# Altium PCB PCB Accel LEDs - Eddie.PcbDoc
Units mm, origin at the board's own origin, x right, y up, seen from the top; angles counter-clockwise.
Board outline 58 x 94 mm, 2 copper layers (L1, L2), stack 1.871 mm thick; 61 components, 53 nets, 212 pads, 57 vias.
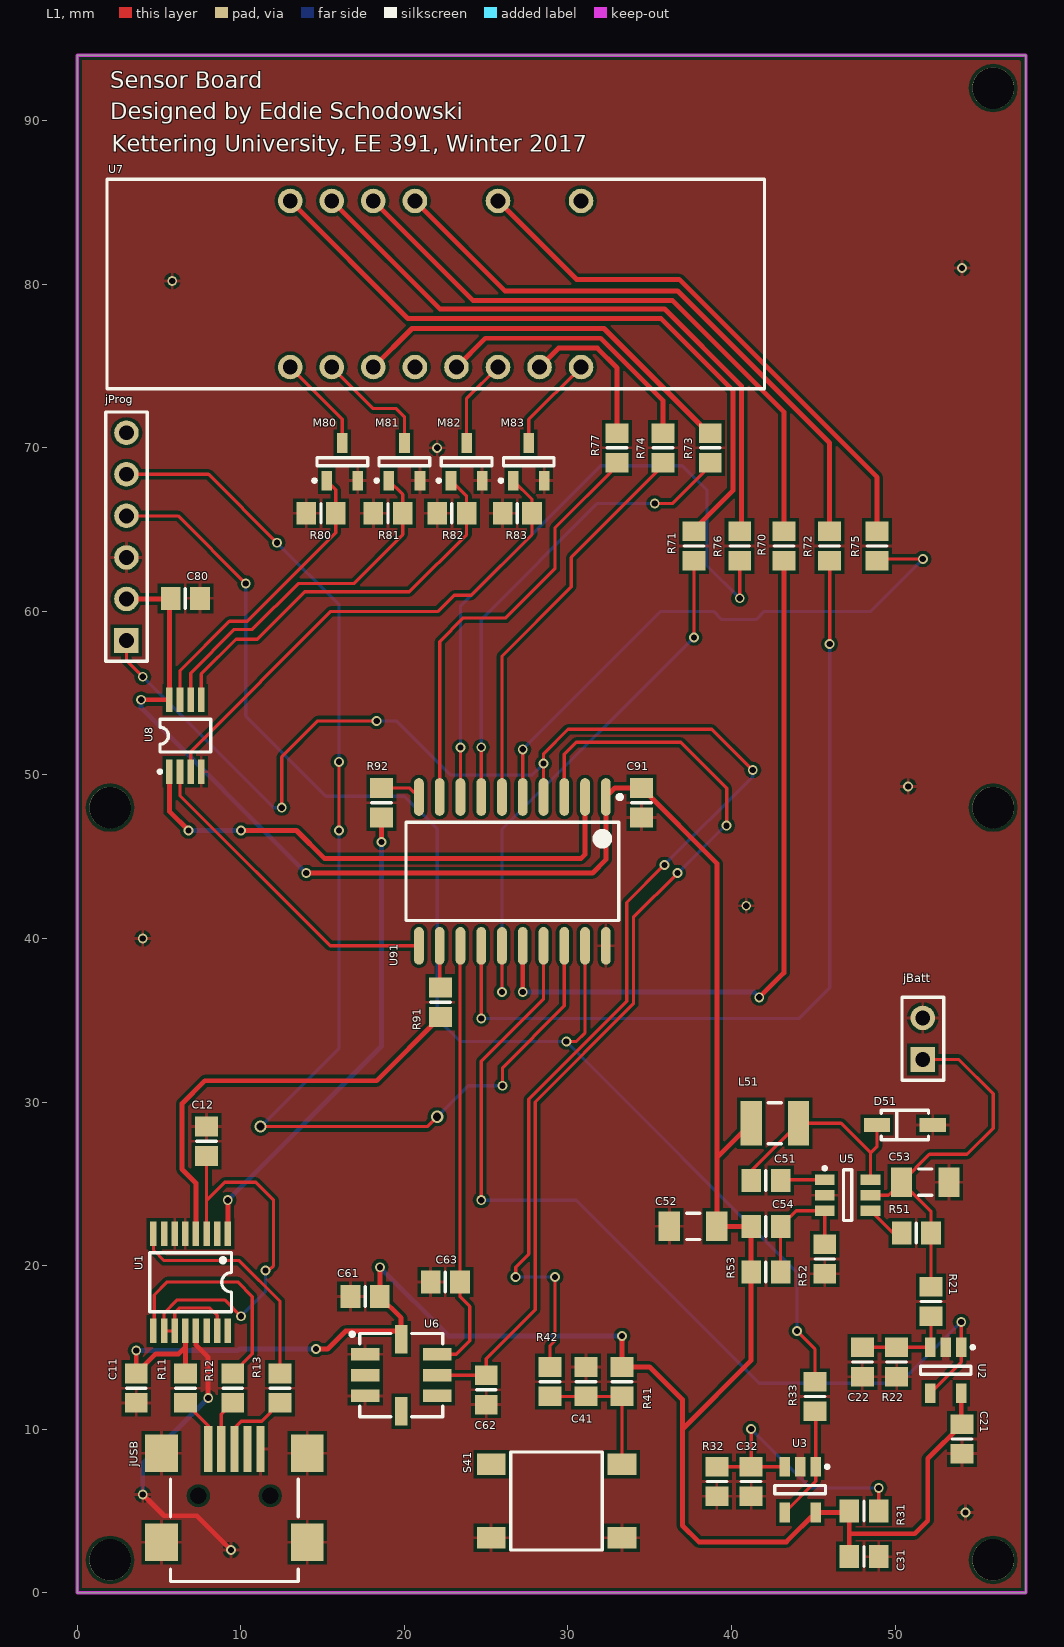
[diagram p0: L1 view]
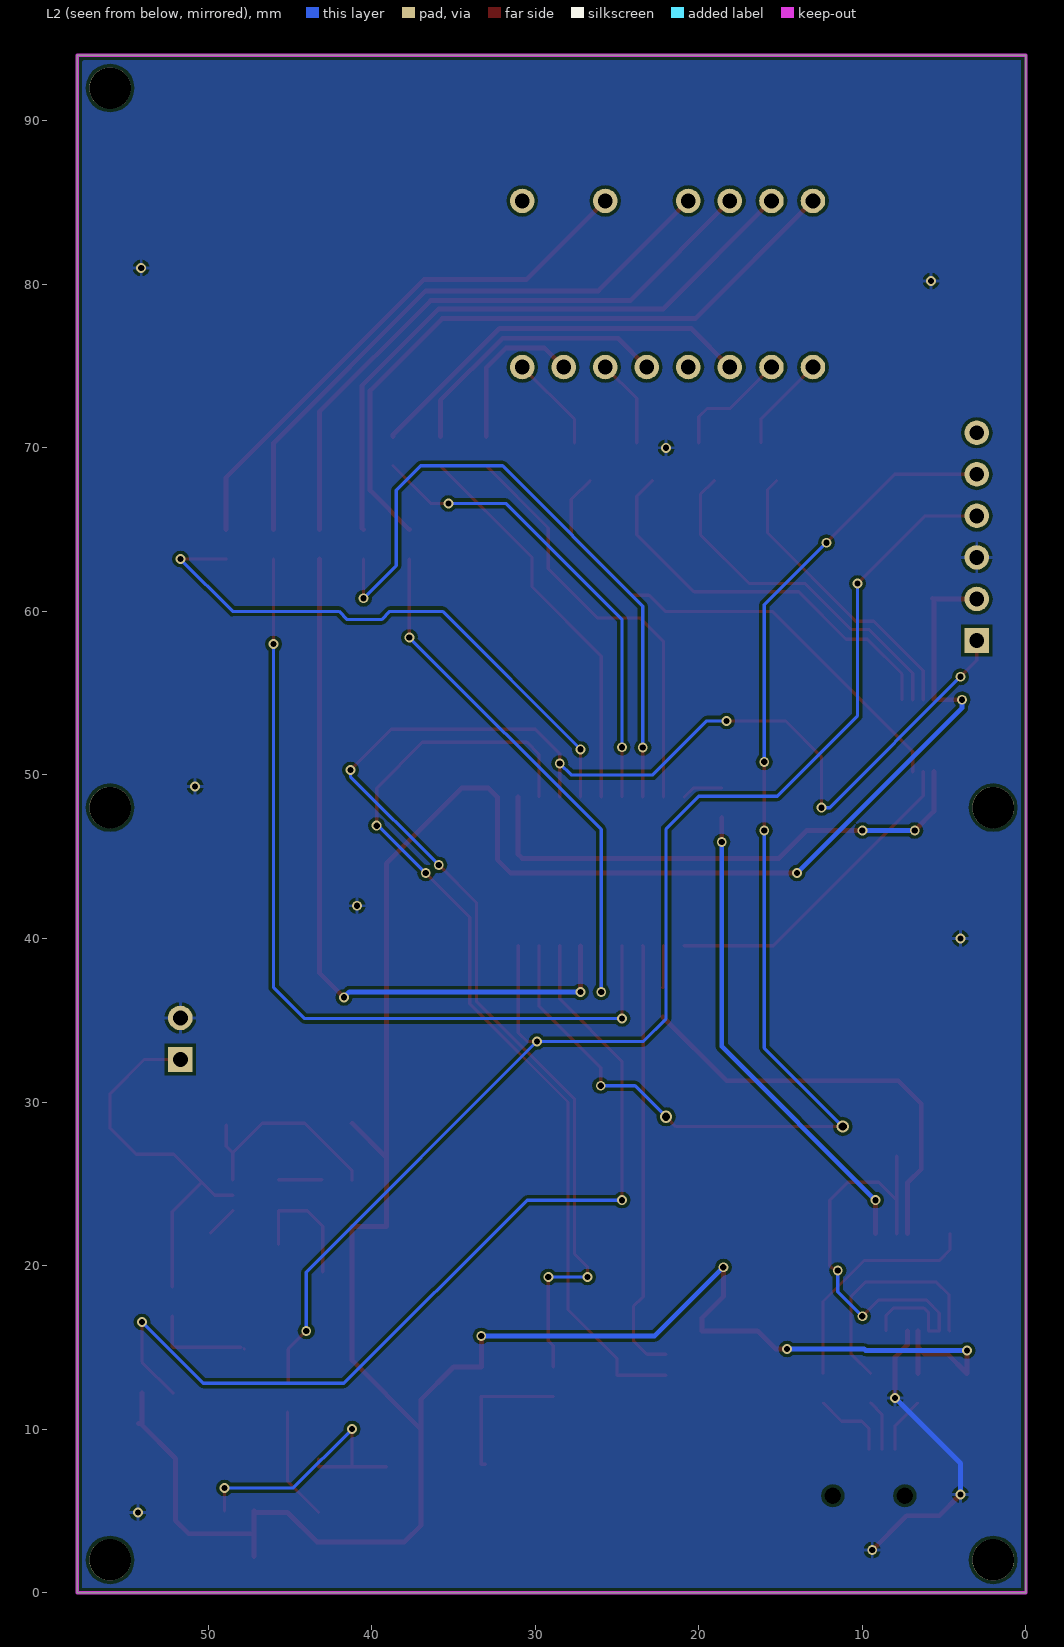
[diagram p1: L2 view, seen from below]

## Layer stack, top to bottom
L1: signal copper 0.0356
Dielectric: core 1.8, FR-4, Dk 4.8
L2: signal copper 0.0356

## Board outline
0,0 58,0 58,94 0,94

## Design rules (kind name [scope] priority, off if disabled: settings)
Clearance [All] p1: gap=0.2
ComponentClearance [All] p1: gap=0.2 collisioncheckmode=3 verticalgap=0.2 showdistances=FALSE
HoleSize [All] p1: absolutevalues=TRUE maxlimit=3.26 minlimit=0.2 maxpercent=80.000 minpercent=20.000
HoleToHoleClearance [All] p1: gap=0.2 allowstackedmicrovias=TRUE
MinimumSolderMaskSliver [All] p1: minsoldermaskwidth=0.01
PolygonConnect "GND Connect" [InComponent('JBAT','SPKR','U2','U3')] p1: connectstyle=Relief reliefconductorwidth=0.5 reliefentries=4 polygonreliefangle="90 Angle"
PolygonConnect "Poly Connect" [All] p2: connectstyle=Relief reliefconductorwidth=0.2 reliefentries=4 polygonreliefangle="90 Angle"
RoutingVias [All] p1: holewidth=0.5 width=1 viastyle="Through Hole" minholewidth=0.381 minwidth=0.6 maxholewidth=1 maxwidth=2
SilkToSilkClearance [All] p1: silktosilkclearance=0.1
SilkscreenOverComponentPads [All] p1: minsilkscreentomaskgap=0.1
SolderMaskExpansion [All] p1: expansion=0.102
Width "Default Width" [All] p1: maxlimit=1.5 minlimit=0.178 preferedwidth=0.2
22 further rules are at their usual default settings.

## Components (designator, comment, footprint, x,y, rotation, side; value= is the part's Value field where it differs from the comment)
C11 "C0805C104K5VACTU" CAPC2012N 3.6,12.5 r270 top
C12 "C0805C104K5VACTU" CAPC2012N 7.9,27.6 r90 top
C21 "C0805C104K5VACTU" CAPC2012N 54.1,9.4 r90 top
C22 "C0805C104K5VACTU" CAPC2012N 48,14.1 r90 top
C31 "C0805C104K5VACTU" CAPC2012N 48.1,2.2 r0 top
C32 "C0805C104K5VACTU" CAPC2012N 41.2,6.8 r270 top
C41 "C0805C102K5RACTU" CAPC2012N 31.1,12.9 r270 top
C51 "C0805C104K5VACTU" CAPC2012N 42.1,25.2 r0 top
C52 "C3216X5R1H106M" CAPC3216N 37.65,22.4 r180 top
C53 "C3216X5R1H106M" CAPC3216N 51.85,25.1 r0 top
C54 "C0805C102K5RACTU" CAPC2012N 42.1,22.4 r0 top
C61 "C0805C104K5VACTU" CAPC2012N 17.6,18.1 r0 top
C62 "C0805C102K5RACTU" CAPC2012N 25,12.4 r90 top
C63 "C0805C102K5RACTU" CAPC2012N 22.5,19 r0 top
C80 "C0805C104K5VACTU" CAPC2012N 6.6,60.8 r0 top
C91 "C0805C104K5VACTU" CAPC2012N 34.5,48.3 r90 top
D51 "MBRX160-TP" SOD123 50.6,28.6 r0 top
jBatt "Header 2" HDR1X2 51.7,32.6 r90 top
jProg "68000-406HLF" HDR1X6 3,64.57 r90 top
jUSB "MUSB-B5-S-RA-TSMT" MUSB-B5-S-RA-TSMT 9.6,5.9 r90 top
L51 "BRL3225T100K" INDC3225N 42.65,28.7 r180 top
M80 "BSS123" SOT23-3N 16.2,69.15 r90 top
M81 "BSS123" SOT23-3N 20,69.15 r90 top
M82 "BSS123" SOT23-3N 23.8,69.15 r90 top
M83 "BSS123" SOT23-3N 27.6,69.15 r90 top
R11 "ERJ-6GEY0R00V" RESC2012N 6.6,12.5 r270 top
R12 "ERJ-6ENF27R0V" RESC2012N 9.5,12.5 r270 top
R13 "ERJ-6ENF27R0V" RESC2012N 12.4,12.5 r270 top
R21 "ERJ-6ENF1002V" RESC2012N 52.2,17.8 r270 top
R22 "ERJ-6ENF1002V" RESC2012N 50.1,14.1 r270 top
R31 "ERJ-6ENF1002V" RESC2012N 48.1,5 r180 top
R32 "NTCS0805E3103FMT" RESC2012N 39.1,6.8 r90 top
R33 "ERJ-6ENF1002V" RESC2012N 45.1,12 r90 top
R41 "ERJ-6ENF1002V" RESC2012N 33.3,12.9 r270 top
R42 "ERJ-6ENF1000V" RESC2012N 28.9,12.9 r270 top
R51 "ERJ-6ENF1003V" RESC2012N 51.3,22 r180 top
R52 "ERJ-6ENF1002V" RESC2012N 45.7,20.4 r270 top
R53 "ERJ-6ENF5492V" RESC2012N 42.1,19.6 r180 top
R70 "ERJ-6ENF4700V" RESC2012N 43.2,64 r90 top
R71 "ERJ-6ENF4700V" RESC2012N 37.7,64 r90 top
R72 "ERJ-6ENF4700V" RESC2012N 46,64 r90 top
R73 "ERJ-6ENF4700V" RESC2012N 38.7,70 r90 top
R74 "ERJ-6ENF4700V" RESC2012N 35.8,70 r90 top
R75 "ERJ-6ENF4700V" RESC2012N 48.9,64 r90 top
R76 "ERJ-6ENF4700V" RESC2012N 40.5,64 r90 top
R77 "ERJ-6ENF4700V" RESC2012N 33,70 r90 top
R80 "ERJ-6ENF1002V" RESC2012N 14.9,66 r0 top
R81 "ERJ-6ENF1002V" RESC2012N 19,66 r0 top
R82 "ERJ-6ENF1002V" RESC2012N 22.9,66 r180 top
R83 "ERJ-6ENF1002V" RESC2012N 26.9,66 r180 top
R91 "ERJ-6ENF10R0V" RESC2012N 22.2,36.1 r270 top
R92 "ERJ-6ENF10R0V" RESC2012N 18.6,48.3 r270 top
S41 "PTS645SK50SMTR92" "PTS645 Series" 29.3,5.6 r0 top
U1 "FT230XS" TSSOP-16 6.925,18.975 r180 top
U2 "MCP6241T" SOT23-5N 53.1,13.6 r270 top
U3 "MCP6241T" SOT23-5N 44.2,6.3 r270 top
U5 "LMR16006Y" SOT23-6N 47.1,24.3 r0 top
U6 "ADXL203CE" LCC-8 19.8,13.3 r0 top
U7 "LTC-4727JR" "LTC Series" 21.91,80.02 r0 top
U8 "SN74LVC1G139" TSSOP-8 6.6,52.4 r0 top
U91 "PIC16F1829-I/SO" SOIC-20-300 26.6,44.1 r270 top

## Footprints (in the part's own frame and the unit in brackets; to place one, negate y for a bottom-side part, rotate by r counter-clockwise, add the part's x,y. Pads: shape width x height; smd on the part's side, far side on the other; paste and mask are expansions set on the pad)
CAPC2012N [mm] "Chip Capacitor, Body 2.0x1.3mm, IPC Medium Density"
  rect 1.2x1.4 smd: 1(-0.9,0) 2(0.9,0)
  silkscreen extent 0,-0.6 0,0.6, body extent -1.07,-0.7 1.07,0.7, height 0.7
CAPC3216N [mm] "Chip Capacitor, Body 3.2x1.6mm, IPC Medium Density"
  rect 1.3x1.8 smd: 1(-1.45,0) 2(1.45,0)
  silkscreen extent -0.4,-0.8 0.4,0.8, body extent -1.7,-0.9 1.7,0.9, height 1.35
HDR1X2 [mm] "Connector; Header; 2 Position"
  rect 1.5x1.5 hole 0.9: 1(0,0)
  round 1.5 hole 0.9: 2(2.54,0)
  silkscreen extent -1.27,-1.27 3.81,1.27
HDR1X6 [mm] "Connector; Header; 6 Position"
  rect 1.5x1.5 hole 0.9: 1(-6.35,0)
  round 1.5 hole 0.9: 2(-3.81,0) 3(-1.27,0) 4(1.27,0) 5(3.81,0) 6(6.35,0)
  silkscreen extent -7.62,-1.27 7.62,1.27, body extent -7.62,-1.27 7.62,1.27, height 8
INDC3225N [mm] "Chip Inductor, Body 3.2x2.5mm, IPC Medium Density"
  rect 1.3x2.7 smd: 1(-1.45,0) 2(1.45,0)
  silkscreen extent -0.4,-1.25 0.4,1.25, body extent -1.7,-1.35 1.7,1.35, height 1.5
LCC-8 [mm] "Terminal Ceramic Leadless Chip Carrier, 8-pin, 50mil pitch"
  rect 1.75x0.762 smd: 1(-2.205,1.27) 2(-2.205,0) 3(-2.205,-1.27) 5(2.205,-1.27) 6(2.205,0) 7(2.205,1.27)
  rect 0.762x1.75 smd: 4(0,-2.205) 8(0,2.205)
  silkscreen extent -3.1,-2.54 2.54,2.6, body extent -2.54,-2.54 2.54,2.54, height 1.98
"LTC Series" [mm] "Through hole LED array, 12.8 x 40.2 x 7.0mm (LxWxH), 2.54mm pitch"
  round 1.5 hole 0.9: 1(-8.89,-5.08) 2(-6.35,-5.08) 3(-3.81,-5.08) 4(-1.27,-5.08) 5(1.27,-5.08) 6(3.81,-5.08) 7(6.35,-5.08) 8(8.89,-5.08) 9(8.89,5.08) 11(3.81,5.08) 13(-1.27,5.08) 14(-3.81,5.08) 15(-6.35,5.08) 16(-8.89,5.08)
  silkscreen extent -20.1,-6.4 20.1,6.4, body extent -20.09,-6.4 20.09,6.4, height 7
MUSB-B5-S-RA-TSMT [mm] "SM Mini-USB Type-A Connector"
  rect 2.3x2 smd: 0(-2.825,4.45) 0(-2.825,-4.45) 0(2.625,4.45) 0(2.625,-4.45)
  rect 2.8x0.5 smd: 1(2.875,1.6) 2(2.875,0.8) 3(2.875,0) 4(2.875,-0.8) 5(2.875,-1.6)
  round 0 hole 1 unplated: ""(0.025,2.2) ""(0.025,-2.2)
  silkscreen extent -5.22,-3.9 1.03,3.9, body extent -5.8,-4.95 3.7,4.95, height 4.03
"PTS645 Series" [mm] "SMT Tactile Switch, 6x6mm body, 4.5mm pitch, 9mm length"
  rect 1.75x1.3 smd: 1(-4,2.25) 2(4,2.25) 3(-4,-2.25) 4(4,-2.25)
  silkscreen extent -2.8,-3 2.8,3, body extent -4.5,-3 4.5,3, height 4.3
RESC2012N [mm] "Chip Resistor, Body 2.0x1.2mm, IPC Medium Density"
  rect 1.2x1.4 smd: 1(-0.9,0) 2(0.9,0)
  silkscreen extent 0,-0.6 0,0.6, body extent -1.07,-0.7 1.07,0.7, height 0.7
SOD123 [mm] "SOD-123; 2 Leads; Body 2.7 x 1.6 mm, (LxW)"
  rect 1.6x0.85 smd: 1(1.7,0) 2(-1.7,0)
  silkscreen extent -1.45,-0.9 1.45,0.9, body extent -1.95,-0.9 1.95,0.9, height 1.18
SOIC-20-300 [mm] "20-Pin Plastic Wide Body Small Outline Integrated Circuit 1.27 mm Pitch, IPC Medium Density"
  oval 2.3x0.6 smd: 1(-4.55,5.715) 2(-4.55,4.445) 3(-4.55,3.175) 4(-4.55,1.905) 5(-4.55,0.635) 6(-4.55,-0.635) 7(-4.55,-1.905) 8(-4.55,-3.175) 9(-4.55,-4.445) 10(-4.55,-5.715) 11(4.55,-5.715) 12(4.55,-4.445) 13(4.55,-3.175) 14(4.55,-1.905) 15(4.55,-0.635) 16(4.55,0.635) 17(4.55,1.905) 18(4.55,3.175) 19(4.55,4.445) 20(4.55,5.715)
  silkscreen extent -4.67,-6.5 3,6.69, body extent -3.75,-6.4 3.75,6.4, height 2.65
SOT23-3N [mm] "SOT23, 3-Leads, Body 2.9x1.3mm, Pitch 0.95mm, Lead Span 2.8mm, IPC Medium Density"
  rect 1.2x0.65 smd: 1(-1.15,0.95) 2(-1.15,-0.95) 3(1.15,0)
  silkscreen extent -1.25,-1.55 0.25,1.8, body extent -1.25,-1.5 1.25,1.5, height 1
SOT23-5N [mm] "SOT23, 5-Leads, Body 2.9x1.6mm, Pitch 0.95mm, Lead Span 2.8mm, IPC Medium Density"
  rect 1.2x0.65 smd: 1(-1.4,0.95) 2(-1.4,0) 3(-1.4,-0.95) 4(1.4,-0.95) 5(1.4,0.95)
  silkscreen extent -1.5,-1.55 0.25,1.75, body extent -1.5,-1.5 1.5,1.5, height 1.45
SOT23-6N [mm] "SOT23, 6-Leads, Body 2.9x1.6mm, Pitch 0.95mm, Lead Span 2.8mm, IPC Medium Density"
  rect 1.2x0.65 smd: 1(-1.4,0.95) 2(-1.4,0) 3(-1.4,-0.95) 4(1.4,-0.95) 5(1.4,0) 6(1.4,0.95)
  silkscreen extent -1.5,-1.55 0.25,1.75, body extent -1.5,-1.5 1.5,1.5, height 1.45
TSSOP-8 [mm] "Shrink Small Outline; 8 Leads; Body Width 3.0 mm; Pitch 0.65 mm"
  rect 0.4x1.5 smd: 1(-0.975,-2.2) 2(-0.325,-2.2) 3(0.325,-2.2) 4(0.975,-2.2) 5(0.975,2.2) 6(0.325,2.2) 7(-0.325,2.2) 8(-0.975,2.2)
  silkscreen extent -1.65,-2.3 1.55,1, body extent -1.55,-2.5 1.55,2.5, height 1.09
TSSOP-16 [mm] "SSOP, Plastic; 16 Leads; Body Width 4.4 mm; Pitch 0.65 mm"
  rect 0.4x1.5 smd: 1(-2.275,-2.975) 2(-1.625,-2.975) 3(-0.975,-2.975) 4(-0.325,-2.975) 5(0.325,-2.975) 6(0.975,-2.975) 7(1.625,-2.975) 8(2.275,-2.975) 9(2.275,2.975) 10(1.625,2.975) 11(0.975,2.975) 12(0.325,2.975) 13(-0.325,2.975) 14(-0.975,2.975) 15(-1.625,2.975) 16(-2.275,2.975)
  silkscreen extent -2.5,-1.8 2.5,1.8, body extent -2.5,-3.2 2.5,3.2, height 1.1

## Part data
C11 C12 C21 C22 C31 C32 C41 C51 C52 C53 C54 C61 C62 C63 C80 C91: library part Cap, "Capacitor"
D51: library part "D Schottky", "Schottky Diode"
jBatt: "Header, 2-Pin"
jProg: library part "Header 6", "Header, 6-Pin"
jUSB: library part "USB Mini-B Conn", "Mini-USB Type-B Connector, Surface Mount"
L51: library part BLM21P221SN, "Ferrite Bead Inductor"
M80 M81 M82 M83: "Low-Power N-Channel MOSFET, 100V 170mA"
R11 R12 R13 R21 R22 R31 R33 R41 R42 R51 R52 R53 R70 R71 R72 R73 R74 R75 R76 R77 R80 R81 R82 R83 R91 R92: library part Res1, "Resistor"
R32: "NTC Thermistor Resistor, 10kOhm"
S41: "Tactile Switch, SPST-NO, Top-Actuated"
U1: "USB to Basic UART Converter"
U2: "Low-Power Operational Amplifier"
U3: library part MCP6241, "Low-Power Operational Amplifier"
U5: library part LMR16006X, "Step-down 2.1MHz Switching Regulator"
U6: "Dual-Axis SMT Accelerometer"
U7: "LED 7-Segment Display, 4-Digit, Common-Cathode"
U8: "Decoder / Demultiplexer, 2-to-4 Line"
U91: "8-Bit FLASH Microcontroller, 20-Pin SOIC"

## Free pads (board coordinates)
  round 2.54 hole 2.54 unplated: ""(2,2) ""(2,48) ""(56,2) ""(56,48) ""(56,92)

## Via types
v1: diameter 0.6, hole 0.381, L1 to L2, tented both sides, 55 vias
v2: diameter 0.75, hole 0.5, L1 to L2, tented both sides, 2 vias

## Nets (pads, with @x,y where several pads share a name; then routed paths per layer and width w, separated by ;. In a path a pad name is that pad's centre, name@x,y a point inside that pad or via, vN(x,y) a via of type N, cw(c..) or ccw(c..) an arc to the next point about the centre after c; other vN are vias at no path point)
3V3USB: C12.1 U1.3 U1.10 U1.11 U1.15 | length 32
  L1 w0.2: C12.1 7.9,24 ; U1.15 8.55,16.95 8.1,17.4 6.225,17.4 5.95,17.125 U1.11 U1.10 5.3,17.1 6.1,17.9 9,17.9 v1(10,16.9) ; v1(11.5,19.7) 11.7,19.7 12,20 12,24 10.9,25.1 9,25.1 7.9,24 ; 7.9,24 U1.3 7.9,24
  L2 w0.2: v1(10,16.9) 11.5,18.4 v1(11.5,19.7)
5V: C11.1 C21.2 C31.1 C52.1 C54.1 C61.2 C80.1 C91.2 jProg.2 L51.2 R11.1 R31.2 R41.1 R53.2 U1.12 U2.5 U3.5 U6.8 U8.8 U91.1 | length 185.9
  L1 w0.3: jProg.2 C80.1@5.64,60.76 ; v1(3.6,14.8) C11.1 4.8,14.6 6.2,14.6 6.5,14.9 ; v1(3.9,54.6) U8.8 C80.1@5.625,60.725 ; C80.1@5.65,60.75 C80.1 ; R11.1 6.6,14.9 ; U1.12 6.6,15 ; v1(14,44) 31.5,44 32.315,44.815 U91.1 32.865,49.2 C91.2 39.1,44.6 39.1,26.6 ; v1(14.6,14.9) 15.3,14.9 16.4,16 19.8,16 19.8,16.8 C61.2 v1(18.5,19.9) ; v1(33.3,15.7) R41.1 35,13.8 37,11.8 37,10 ; L51.2 39.1,26.6 ; C31.1 47.2,3.6 ; U2.5 54.05,10.35 54.1,10.35 C21.2@54.25,10.35 ; C21.2 52,8.2 52,4.4 51.2,3.6 47.2,3.6 ; 6.5,14.9 6.6,14.9 ; 6.5,14.9 6.6,15 ; 6.6,14.9 6.6,15 ; 37,10 41.2,14.2 R53.2 C54.1 C52.1 39.1,26.6 ; 37,10 37,4.1 38,3.1 43.35,3.1 U3.5 47.1,4.9 R31.2 47.2,3.6
  L2 w0.3: v1(3.6,14.8) 9.8,14.8 9.9,14.9 v1(14.6,14.9) ; v1(3.9,54.6) 3.9,54.1 v1(14,44) ; v1(18.5,19.9) 22.7,15.7 v1(33.3,15.7)
A: U8.1 U91.2 | length 32.6
  L1 w0.3: U8.1 5.625,47.775 v1(6.8,46.6) ; v1(10,46.6) 13.4,46.6 15.1,44.9 30.8,44.9 31.045,45.145 U91.2
  L2 w0.3: v1(6.8,46.6) v1(10,46.6)
AN3: C62.2 U6.6 U91.3 | length 59.1
  L1 w0.2: U6.6 C62.2 25,14.3 28,17.3 28,30 34,36 34,41.3 v1(36.7,44) ; U91.3 29.775,51.275 30.5,52 36.9,52 39.7,49.2 v1(39.7,46.9)
  L2 w0.2: v1(36.7,44) 39.6,46.9 v1(39.7,46.9)
AN10: C63.2 U6.7 U91.13 | length 26.7
  L1 w0.2: U6.7 23.17,14.57 24,15.4 24,17.5 23.4,18.1 C63.2 23.4,39.525 U91.13
B: U8.2 U91.11 | length 19.9
  L1 w0.2: U8.2 6.275,48.725 15.45,39.55 U91.11
BST: C51.2 U5.1 | length 2.6
  L1 w0.2: C51.2@43.05,25.25 U5.1
D+: jUSB.3 R13.2 | length 4.7
  L1 w0.2: jUSB.3 9.6,10.049 10.026,10.475 11.275,10.475 R13.2
D-: jUSB.2 R12.2 | length 3.1
  L1 w0.2: jUSB.2 8.8,10.9 R12.2
EN: R51.2 U5.4 | length 1.9
  L1 w0.2: U5.4 R51.2@49.85,22
FB: C54.2 R52.1 R53.1 U5.3 | length 7.9
  L1 w0.2: R53.1 C54.2 43.95,23.35 U5.3 R52.1
GND: C11.2 C12.2 C21.1 C22.1 C31.2 C32.2 C41.1 C52.2 C53.2 C61.1 C62.1 C63.1 C80.2 C91.1 D51.1 jBatt.2 jProg.3 jUSB.0 jUSB.5 M80.2 M81.2 M82.2 M83.2 R22.2 R32.1 R52.2 R80.1 R81.1 R82.2 R83.2 S41.3 S41.4 U1.5 U1.6 U1.13 U2.2 U3.2 U5.2 U6.1 U6.3 U8.4 U91.20 | length 18.8
  L1 w0.3: v1(4,6) 5.3,4.7 7.3,4.7 v1(9.4,2.6) ; U1.13 7.25,15.15 8,14.4 v1(8,11.9)
  L2 w0.3: v1(4,6) 4,7.9 v1(8,11.9)
  other v1: 54.3,4.9 4,40 40.9,42 50.8,49.3 22,70 5.8,80.2 54.1,81
ICSPCLK: jProg.5 U91.18 | length 76.2
  L1 w0.2: jProg.5 8.02,68.38 v1(12.2,64.2) ; v2(11.2,28.5) 21.4,28.5 v2(22,29.1) ; v1(16,46.6) v1(16,50.8) ; v1(26,31) 26,32.1 29.775,35.875 U91.18
  L2 w0.2: v2(11.2,28.5) 16,33.3 v1(16,46.6) v1@16,46.566 ; v1(12.2,64.2) 16,60.4 v1(16,50.8) ; v2(22,29.1) 23.9,31 v1(26,31)
ICSPDAT: jProg.4 R33.2 U91.19 | length 85.5
  L1 w0.2: jProg.4 6.16,65.84 v1(10.3,61.7) ; v1(29.9,33.7) 30.5,33.7 31.045,34.245 U91.19 ; v1(44,16) 45.1,14.9 R33.2
  L2 w0.2: v1(10.3,61.7) 10.3,53.6 15.2,48.7 20,48.7 22,46.7 22,35.1 23.4,33.7 v1(29.9,33.7) 44,19.6 v1(44,16)
LED_A: R70.1 U91.16 | length 44.8
  L1 w0.3: v1(27.235,36.735) U91.16 ; v1(41.7,36.4) 43.2,37.9 R70.1 R70.1@43.2,63.2
  L2 w0.3: v1(27.235,36.735) 41.365,36.735 v1(41.7,36.4)
LED_B: R71.1 U91.15 | length 34.1
  L1 w0.2: v1(25.965,36.735) U91.15 ; v1(37.7,58.4) R71.1 R71.1@37.7,63.2
  L2 w0.2: v1(25.965,36.735) 25.965,46.665 v1(37.7,58.4)
LED_C: R72.1 U91.14 | length 52.7
  L1 w0.2: v1(24.695,35.105) U91.14 ; v1(46,58) R72.1 R72.1@46,63.2
  L2 w0.2: v1(24.695,35.105) 44.105,35.105 46,37 v1(46,58)
LED_D: R73.1 U91.7 | length 28.7
  L1 w0.2: U91.7 v1(24.695,51.695) ; v1(35.3,66.6) 36.4,66.6 R73.1@38.7,68.9
  L2 w0.2: v1(24.695,51.695) 24.695,59.495 31.8,66.6 v1(35.3,66.6)
LED_DP: R77.1 U91.9 | length 26.3
  L1 w0.2: U91.9 22.155,58.155 23.6,59.6 26.2,59.6 29.2,62.6 29.2,65.1 R77.1@33,68.9
LED_E: R74.1 U91.6 | length 24.3
  L1 w0.2: U91.6 25.965,57.265 30.2,61.5 30.2,63.3 R74.1@35.8,68.9
LED_F: R75.1 U91.5 | length 35.4
  L1 w0.2: U91.5 v1(27.235,51.565) ; R75.1@48.9,63.2 v1(51.7,63.2)
  L2 w0.2: v1(27.235,51.565) 35.67,60 38.9,60 39.4,59.5 41.5,59.5 42,60 48.5,60 v1(51.7,63.2)
LED_G: R76.1 U91.8 | length 40.8
  L1 w0.2: U91.8 v1(23.425,51.675) ; v1(40.5,60.8) R76.1 R76.1@40.5,63.2
  L2 w0.2: v1(23.425,51.675) 23.425,60.325 32,68.9 37,68.9 38.5,67.4 38.5,62.8 v1(40.5,60.8)
NetC41_2: C41.2 R41.2 R42.2 S41.2 | length 8.8
  L1 w0.2: R42.2 C41.2 R41.2 S41.2 S41.2@33.05,7.85
NetM80_3: M80.3 U7.1 | length 6
  L1 w0.2: U7.1 16.2,71.76 M80.3
NetM81_3: M81.3 U7.2 | length 7.5
  L1 w0.2: U7.2@15.56,74.74 U7.2 18.1,72.4 19.5,72.4 20,71.9 M81.3
NetM82_3: M82.3 U7.6 | length 5.4
  L1 w0.2: M82.3 23.8,73.02 U7.6
NetM83_3: M83.3 U7.8 | length 6
  L1 w0.2: M83.3 27.6,71.74 U7.8
NetR70_2: R70.2 U7.14 | length 37.6
  L1 w0.3: U7.14 24.2,79 36.4,79 43.2,72.2 R70.2@43.2,65
NetR71_2: R71.2 U7.16 | length 41.4
  L1 w0.3: U7.16 20.22,77.9 35.7,77.9 40.1,73.5 40.1,67.4 R71.2@37.7,65
NetR72_2: R72.2 U7.13 | length 36.8
  L1 w0.3: U7.13 26.14,79.6 36.7,79.6 46,70.3 R72.2@46,65
NetR73_2: R73.2 U7.3 | length 24.4
  L1 w0.3: U7.3 20.46,77.3 32.2,77.3 38.65,70.85 38.7,70.8 R73.2@38.7,70.7
NetR74_2: R74.2 U7.5 | length 17.1
  L1 w0.3: U7.5 24.94,76.7 32,76.7 35.8,72.9 R74.2 R74.2@35.8,70.7
NetR75_2: R75.2 U7.11 | length 33.4
  L1 w0.3: U7.11 30.52,80.3 36.8,80.3 48.9,68.2 R75.2@48.9,65
NetR76_2: R76.2 U7.15 | length 38.6
  L1 w0.3: U7.15 22.16,78.5 35.9,78.5 40.6,73.8 40.6,65.1 R76.2@40.5,65
NetR77_2: R77.2 U7.7 | length 9.9
  L1 w0.3: U7.7 29.42,76.1 31.8,76.1 33,74.9 R77.2 R77.2@33,70.7
NTCBUFF: R33.1 U3.1 U3.4 | length 6.9
  L1 w0.2: U3.4 45.15,6.8 U3.1 R33.1@45.15,11.05
NTCDIV: C32.1 R31.1 R32.2 U3.3 | length 17.6
  L1 w0.2: R32.2 C32.1 ; v1(41.2,10) C32.1 ; U3.3@43.25,8.15 U3.3 C32.1 ; R31.1 v1(49,6.4)
  L2 w0.2: v1(41.2,10) 44.8,6.4 v1(49,6.4)
RX: R92.1 U91.10 | length 2.5
  L1 w0.2: R92.1 20.335,49.2 U91.10
RXD: R91.2 U1.4 | length 26.3
  L1 w0.3: U1.4 7.25,25.05 6.4,25.9 6.4,29.9 7.8,31.3 18.3,31.3 R91.2
SW: C51.1 D51.2 L51.1 U5.6 | length 13.4
  L1 w0.2: C51.1 41.2,25.8 L51.1 46.7,28.7 48.5,26.9 ; U5.6 48.5,26.9 ; D51.2 48.9,27.3 48.5,26.9
TX: R91.1 U91.12 | length 2.6
  L1 w0.2: U91.12 22.155,37.045 R91.1
TXD: R92.2 U1.1 | length 29.3
  L1 w0.3: U1.1 v1(9.2,24) ; v1(18.6,45.9) R92.2
  L2 w0.3: v1(9.2,24) 18.6,33.4 v1(18.6,45.9)
USBM: R12.1 U1.9 | length 14.1
  L1 w0.2: U1.9 4.7,16.05 4.7,18.2 5.5,19 9.8,19 10.7,18.1 10.7,14.6 R12.1
USBP: R13.1 U1.8 | length 14.5
  L1 w0.178: U1.8 4.65,20.95 5.3,20.3 9.9,20.3 12.4,17.8 R13.1
VBATT: C53.1 jBatt.1 R21.1 R51.1 U5.5 | length 23.6
  L1 w0.2: U5.5 49.6,24.3 C53.1 ; jBatt.1 53.9,32.6 56,30.5 56,28.4 54.4,26.8 52.1,26.8 C53.1 ; R21.1 R51.1 52.2,23.3 C53.1
VDCBUFF: U2.1 U2.4 U91.17 | length 57.8
  L1 w0.2: v1(24.7,24) 24.7,32.5 28.505,36.305 U91.17 ; U2.4 54.05,14.1 U2.1 v1(54.05,16.55)
  L2 w0.2: v1(24.7,24) 30.5,24 41.7,12.8 50.3,12.8 v1(54.05,16.55)
VDCDIV: C22.2 R21.2 R22.1 U2.3 | length 6
  L1 w0.2: C22.2 R22.1 U2.3 ; U2.3@52.2,15.05 R21.2
VPP: jProg.1 R42.1 U91.4 | length 98.3
  L1 w0.2: jProg.1 3,57 v1(4,56) ; v1(12.5,48) 12.5,51.1 14.7,53.3 v1(18.3,53.3) ; v1(26.8,19.3) 26.8,19.9 27.6,20.7 27.6,30.166 33.6,36.166 33.6,42.2 v1(35.9,44.5) ; U91.4 v1(28.505,50.695) 28.505,51.305 30,52.8 38.8,52.8 v1(41.3,50.3) ; R42.1 28.9,15.1 29.2,15.4 v1(29.2,19.3)
  L2 w0.2: v1(4,56) 12,48 v1(12.5,48) ; v1(18.3,53.3) 19.51,53.3 22.81,50 27.81,50 v1(28.505,50.695) ; v1(26.8,19.3) v1(29.2,19.3) ; v1(35.9,44.5) 41.3,49.9 v1(41.3,50.3)
VUSB: jUSB.1 R11.2 | length 3.4
  L1 w0.2: R11.2 8,10.2 jUSB.1
Y0: M80.1 R80.2 U8.7 | length 18.2
  L1 w0.2: U8.7 6.275,56.375 9.3,59.4 10.4,59.4 15.8,64.8 R80.2 15.8,67.45 M80.1
Y1: M81.1 R81.2 U8.6 | length 21.8
  L1 w0.2: U8.6 6.925,56.225 9.6,58.9 10.7,58.9 13.5,61.7 16.9,61.7 19.9,64.7 R81.2 19.9,67.15 M81.1
Y2: M82.1 R82.1 U8.5 | length 25
  L1 w0.2: U8.5 7.575,56.175 9.7,58.3 11,58.3 13.9,61.2 20.3,61.2 23.8,64.7 R82.1 23.8,67.05 M82.1
Y3: M83.1 R83.1 U8.3 | length 31.4
  L1 w0.2: U8.3 6.925,51.425 15.5,60 22.056,60 23.041,60.985 24.085,60.985 27.8,64.7 R83.1 27.8,66.85 M83.1
pads on no net: jProg.6 jUSB. jUSB.4 S41.1 U1.2 U1.7 U1.14 U1.16 U6.2 U6.4 U6.5 U7.4 U7.9

## Polygon pours and split planes (outlines as drawn)
GND on L2 "GND" (solid, remove dead copper, pour order 1001): 58,0 58,94 0,94 0,0
GND on L1 "GND" (solid, remove dead copper, pour order 1001): 58,0 58,94 0,94 0,0

## Keep-outs
Keep-Out Layer:
  the board outline again, w0.2

## Silkscreen, mask and mechanical layers (free items; w line width, h text height)
Top Overlay:
  text "Sensor Board" at 2,92 h1
  text "Designed by Eddie Schodowski" at 2,90.1 h1
  text "Kettering University, EE 391, Winter 2017" at 2.1,88.1 h1

## Dimensions
0,0 to 0,94 on Mechanical 1
0,0 to 58,0 on Mechanical 1
0,0 to 0,94 on Mechanical 1
0,0 to 58,0 on Mechanical 1